# Altium PCB nizn.PcbDoc
Units mil, origin at the board's own origin, x right, y up, seen from the top; angles counter-clockwise.
Board outline 5100 x 2650 mil, 2 copper layers (Top Layer, Bottom Layer); 71 components, 46 nets, 177 pads, 0 vias.
Unrouted connection lines stored in the file: 122.
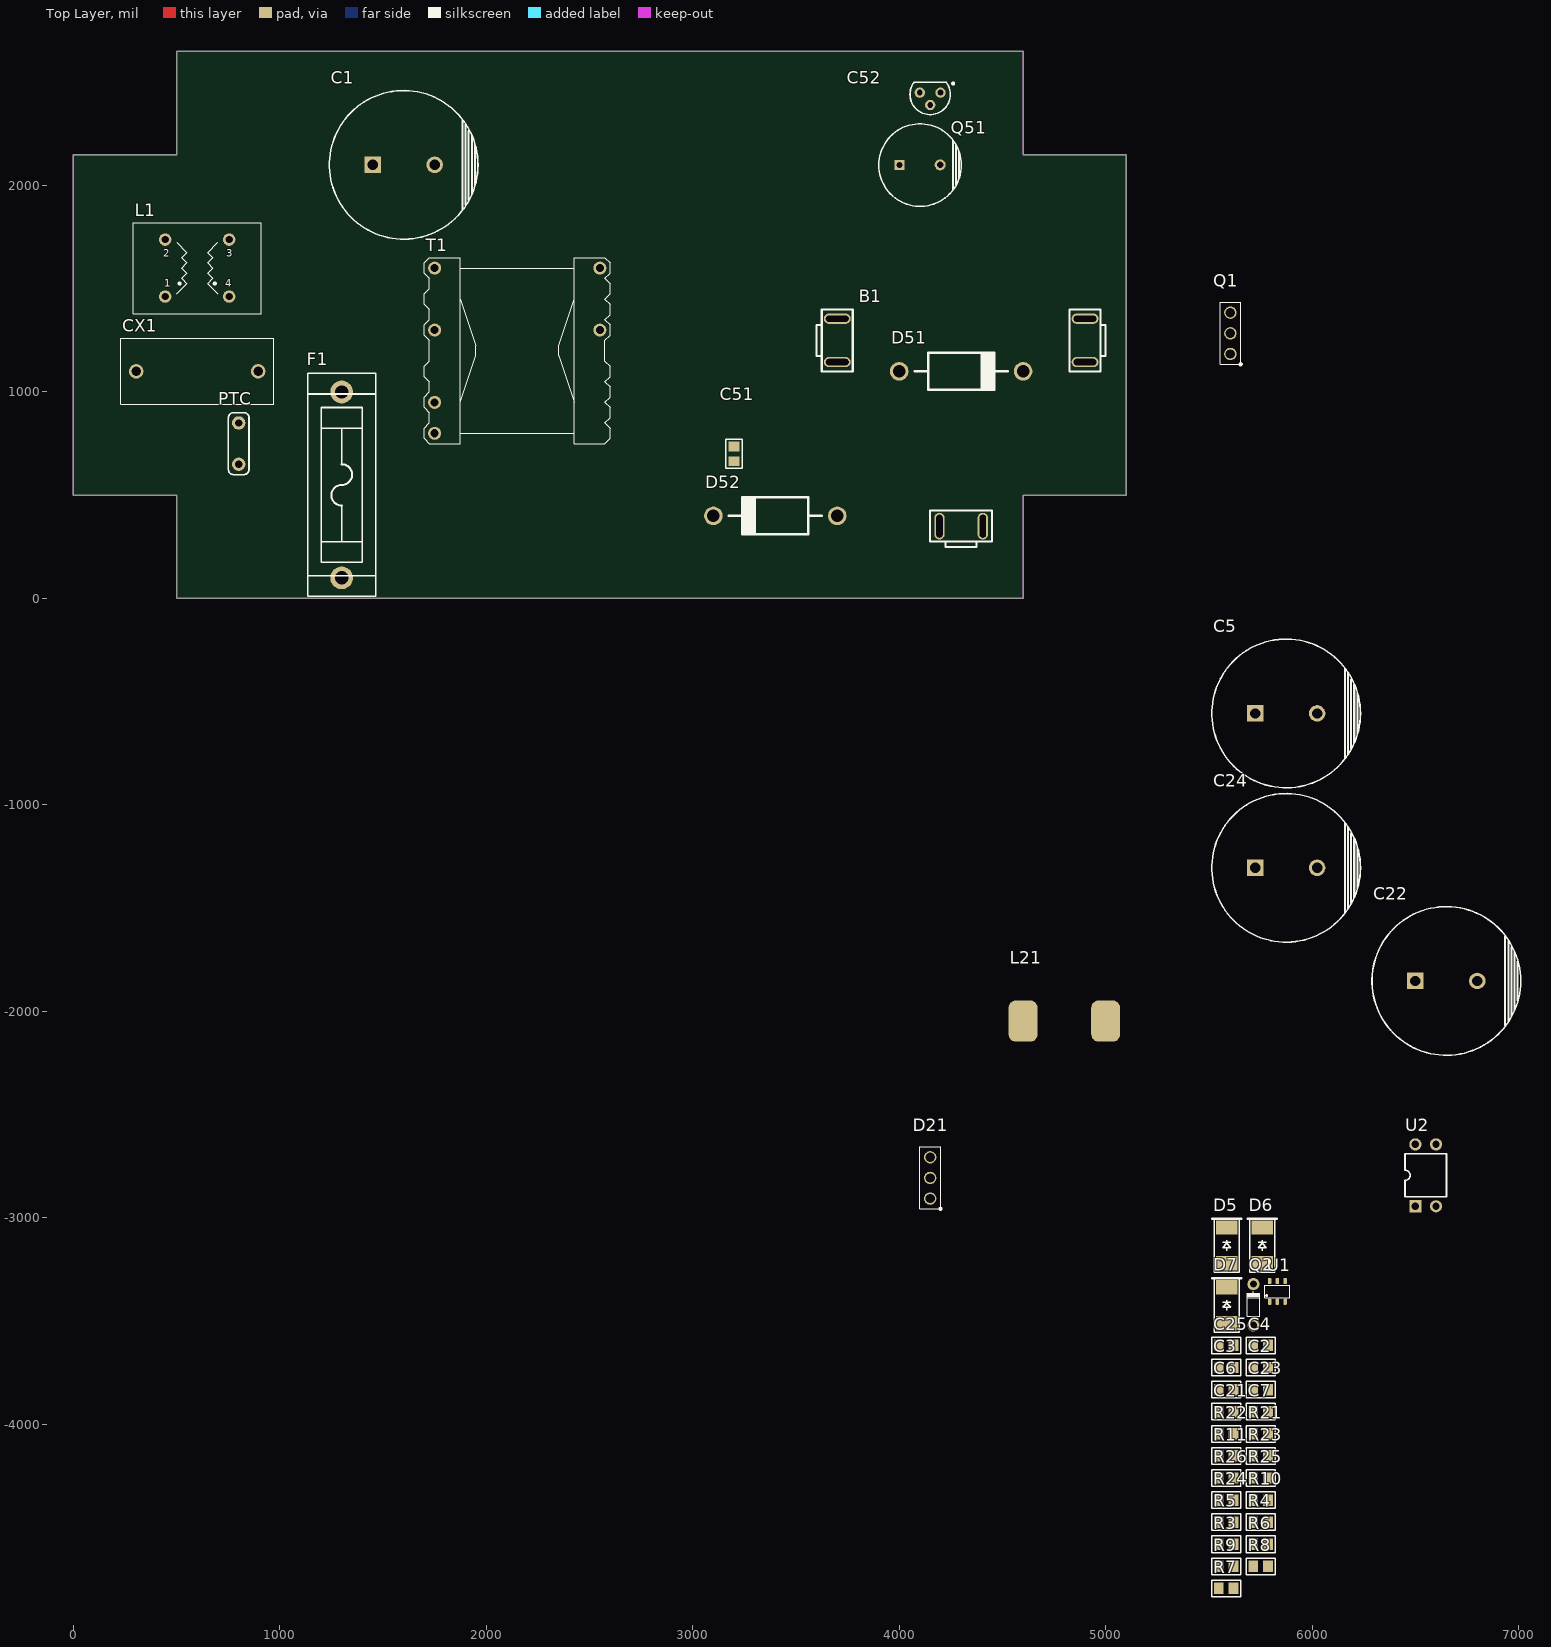
[diagram p0: Top Layer view]
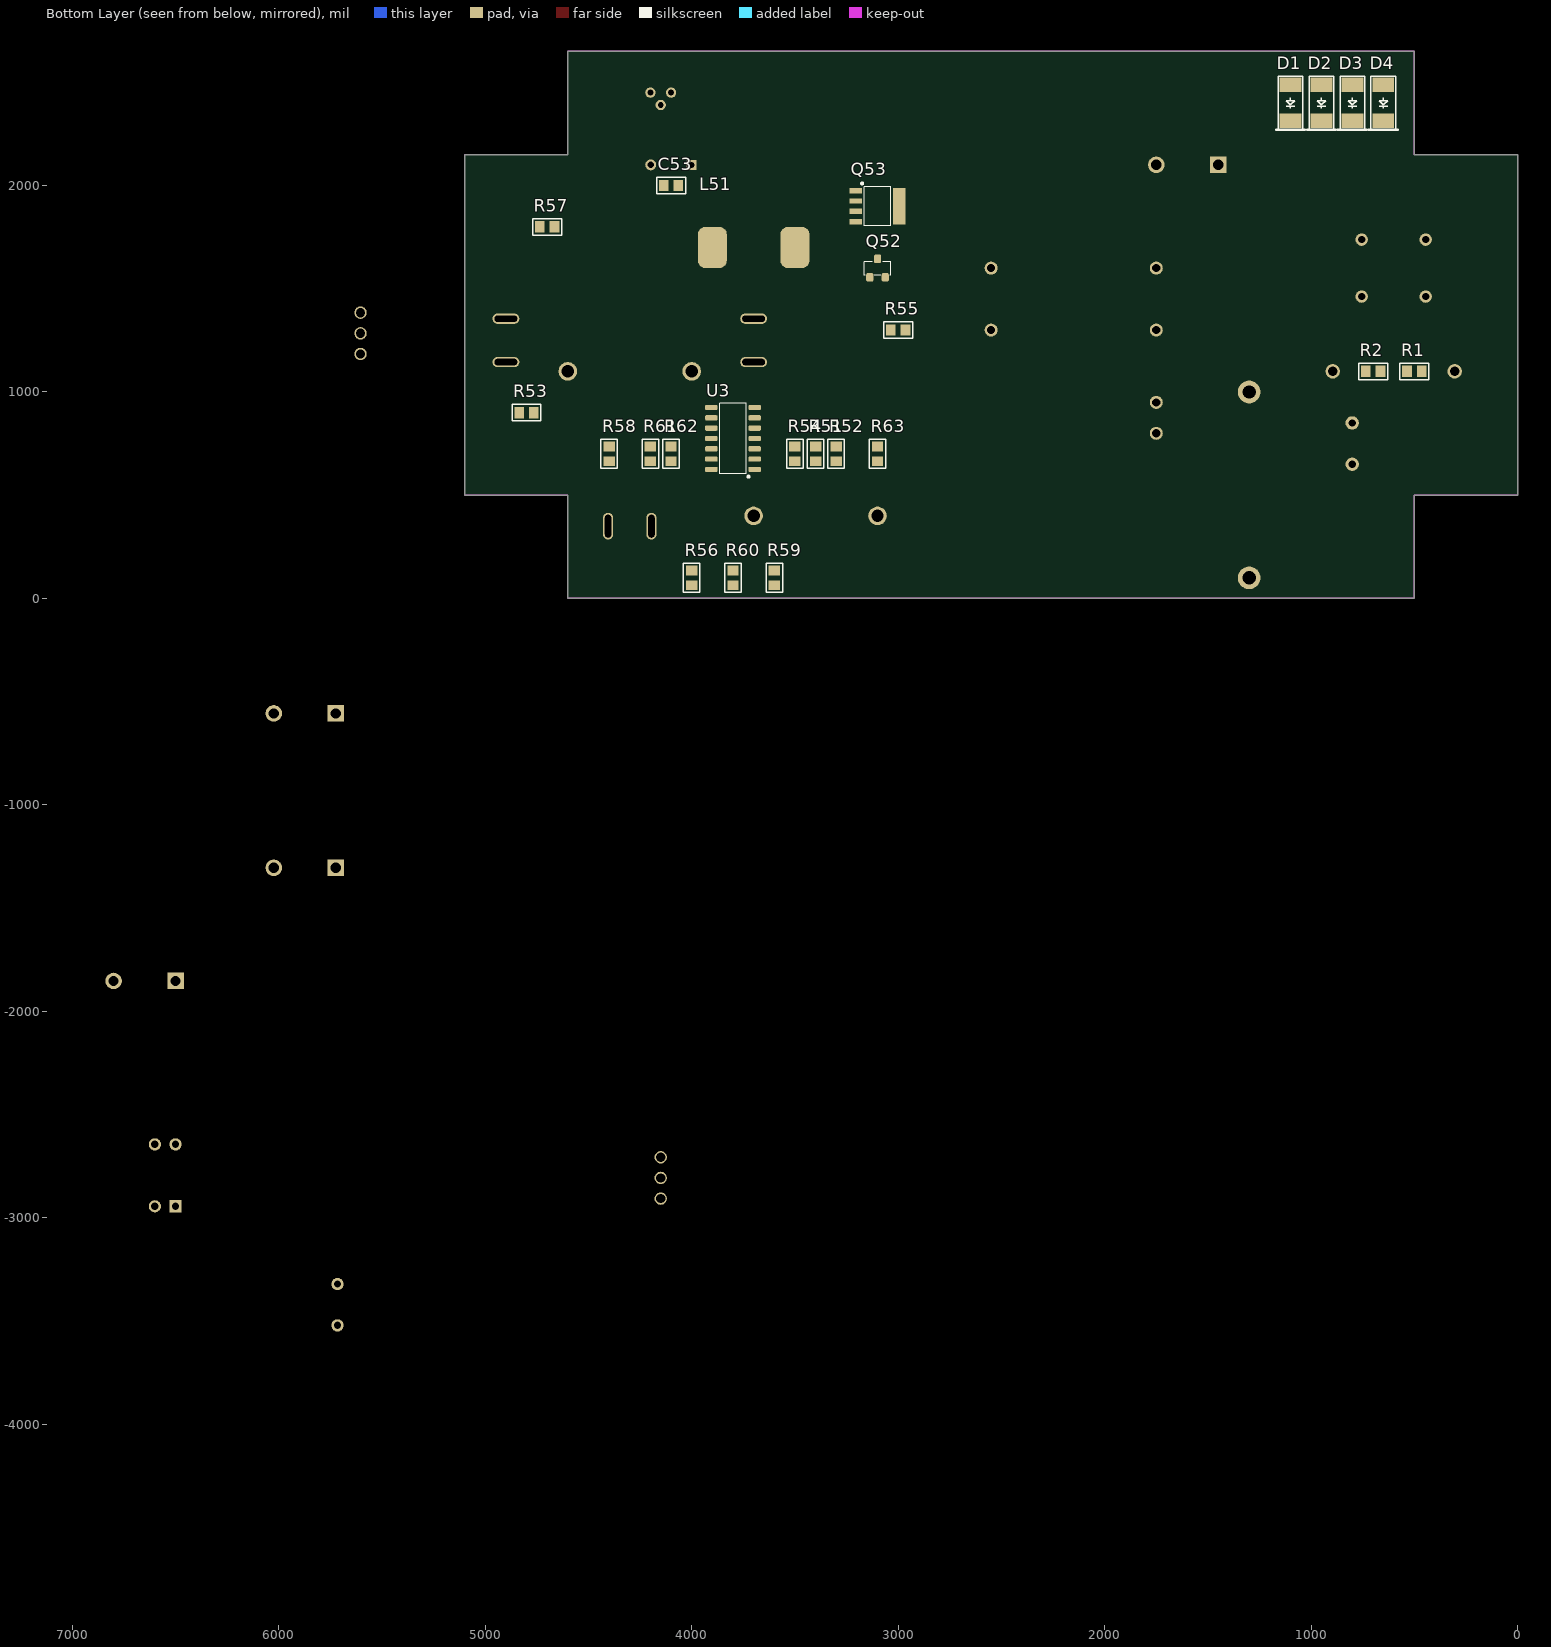
[diagram p1: Bottom Layer view, seen from below]

## Layer stack, top to bottom
Top Layer: signal copper 1.4
Dielectric: dielectric 12.6, FR-4, Dk 4.8
Bottom Layer: signal copper 1.4

## Board outline
0,500 0,2150 500,2150 500,2650 4600,2650 4600,2150 5100,2150 5100,500 4600,500 4600,0 500,0 500,500

## Design rules (kind name [scope] priority, off if disabled: settings)
Clearance [All] p1: gap=10
Height [All] p1: minheight=0 maxheight=2000 prefheight=500
PolygonConnect [All] p1: connectstyle=Relief reliefconductorwidth=10 reliefentries=4 polygonreliefangle="90 Angle" airgapwidth=10
RoomDefinition power [InComponentClass('power')] p1: confinementstyle=ConfineOut formatcopy=TRUE lockcomponents=FALSE outline 5500,1000 6000,1000 6000,1500 5500,1500
RoomDefinition charger [InComponentClass('charger')] p2: confinementstyle=ConfineOut formatcopy=TRUE lockcomponents=FALSE outline 5500,0 6000,0 6000,500 5500,500
RoutingVias [All] p1: holewidth=28 width=50 viastyle="Through Hole" minholewidth=28 minwidth=50 maxholewidth=28 maxwidth=50
SolderMaskExpansion [All] p1: expansion=4
Width [All] p1: maxlimit=10 minlimit=10 preferedwidth=10
27 further rules are at their usual default settings.

## Classes and differential pairs
component class charger: B1 C51 C52 C53 D51 D52 L51 Q51 Q52 Q53 R51 R52 R53 R54 R55 R56 R57 R58 R59 R60 R61 R62 R63 U3
component class power: C1 C2 C3 C4 C5 C6 C7 C21 C22 C23 C24 C25 CX1 D1 D2 D3 D4 D5 D6 D7 D21 F1 L1 L21 PTC Q1 Q2 R1 R2 R3 R4 R5 R6 R7 R8 R9 R10 R11 R21 R22 R23 R24 R25 R26 T1 U1 U2

## Components (designator, comment, footprint, x,y, rotation, side; value= is the part's Value field where it differs from the comment)
B1 "BATT" BATT 4300,1250 r0 top
C1 "68uF400V" CAP1 1600,2100 r0 top
C2 "Cap" CAP0805 5750.5,-3724.63 r0 top
C3 "Cap" CAP0805 5583.5,-3724.63 r0 top
C4 "Cap" CAP0805 5750.5,-3617.63 r0 top
C5 "10uF" CAP1 5873.94,-556.81 r0 top
C6 "Cap" CAP0805 5583.5,-3831.63 r0 top
C7 "Cap" CAP0805 5750.5,-3938.63 r0 top
C21 "Cap" CAP0805 5583.5,-3938.63 r0 top
C22 "330uF" CAP1 6650,-1852.56 r0 top
C23 "Cap" CAP0805 5750.5,-3831.63 r0 top
C24 "68uF400V" CAP1 5873.94,-1304.68 r0 top
C25 "Cap" CAP0805 5583.5,-3617.63 r0 top
C51 "Cap" CAP0805 3200,700 r90 top
C52 "330uF25V" CAP2 4100,2100 r0 top
C53 "Cap" CAP0805 4100,2000 r180 bottom
CX1 "Cap" CAPX2 600,1100 r180 top
D1 "M7" DO214AC 1100,2400 r270 bottom
D2 "M7" DO214AC 950,2400 r270 bottom
D3 "M7" DO214AC 800,2400 r270 bottom
D4 "M7" DO214AC 650,2400 r270 bottom
D5 "ES1J" DO214AC 5586,-3133.57 r90 top
D6 "1N4148" DO214AC 5758,-3133.57 r90 top
D7 "ES1J" DO214AC 5586,-3423.07 r90 top
D21 "MBR2080CT" TO220 4150,-2806.4 r90 top
D51 "1N5822" DIO4 4300,1100 r0 top
D52 "1N5822" DIO4 3400,400 r180 top
F1 "2A250V" FUSE 1300,1000 r270 top
L1 "1mH" BU9 600,1600 r0 top
L21 "33uH" CD127 4800,-2046.82 r0 top
L51 "33uH" CD127 3700,1700 r180 bottom
PTC "5D-9" PTC 801,750 r90 top
Q1 "HX840" TO220 5604,1284.12 r90 top
Q2 "TL431" DIO2 5715.53,-3420.6 r90 top
Q51 "TL431" TO-92D 4150,2450 r90 top
Q52 "BC847C" SOT23_CBE 3100,1600 r180 bottom
Q53 "SI4425" SO8-MOS 3100,1900 r270 bottom
R1 "Res1" RES0805 500,1100 r180 bottom
R2 "Res1" RES0805 700,1100 r180 bottom
R3 "Res1" RES0805 5583.5,-4580.63 r0 top
R4 "Res1" RES0805 5750.5,-4473.63 r0 top
R5 "Res1" RES0805 5583.5,-4473.63 r0 top
R6 "Res1" RES0805 5750.5,-4580.63 r0 top
R7 "Res1" RES0805 5583.5,-4794.63 r0 top
R8 "Res1" RES0805 5750.5,-4687.63 r0 top
R9 "Res1" RES0805 5583.5,-4687.63 r0 top
R10 "Res1" RES0805 5750.5,-4366.63 r0 top
R11 "Res1" RES0805 5583.5,-4152.63 r0 top
R21 "Res1" RES0805 5750.5,-4045.63 r0 top
R22 "Res1" RES0805 5583.5,-4045.63 r0 top
R23 "Res1" RES0805 5750.5,-4152.63 r0 top
R24 "Res1" RES0805 5583.5,-4366.63 r0 top
R25 "Res1" RES0805 5750.5,-4259.63 r0 top
R26 "Res1" RES0805 5583.5,-4259.63 r0 top
R51 "Res1" RES0805 3400,700 r270 bottom
R52 "Res1" RES0805 3300,700 r90 bottom
R53 "Res1" RES0805 4800,900 r180 bottom
R54 "Res1" RES0805 3500,700 r270 bottom
R55 "Res1" RES0805 3000,1300 r180 bottom
R56 "Res1" RES0805 4000,100 r270 bottom
R57 "Res1" RES0805 4700,1800 r180 bottom
R58 "Res1" RES0805 4400,700 r90 bottom
R59 "Res1" RES0805 3600,100 r270 bottom
R60 "Res1" RES0805 3800,100 r90 bottom
R61 "Res1" RES0805 4200,700 r90 bottom
R62 "Res1" RES0805 4100,700 r270 bottom
R63 "Res1" RES0805 3100,700 r90 bottom
T1 "Transformer" PQ20C1 2150,1200 r0 top
U1 "OB2263" SOT23-6 5831.56,-3356.07 r0 top
U2 "PC817C" DIP-4 6550,-2794.04 r0 top
U3 "TINY24A" SO14 3800,700 r90 bottom

## Footprints (in the part's own frame and the unit in brackets; to place one, negate y for a bottom-side part, rotate by r counter-clockwise, add the part's x,y. Pads: shape width x height; smd on the part's side, far side on the other; paste and mask are expansions set on the pad)
BATT [mil]
  oval 130x50 hole 30 slot 110 at 0 deg: 1(600,-105) 1(600,105) 2(-600,-105) 2(-600,105)
  oval 50x130 hole 30 slot 110 at 90 deg: 3(-105,-900) 3(105,-900)
  silkscreen extent -700,-1000 700,150, body extent -700,-1000 700,105, height 800
BU9 [mil]
  round 60 hole 35: 1(-155,-138) 2(-155,138) 3(155,138) 4(155,-138)
  silkscreen extent -310,-220 310,220, body extent -311,-217 311,217, height 625
CAP1 [mil]
  rect 80x80 hole 50: 1(-150,0)
  round 80 hole 50: 2(150,0)
  silkscreen extent -360,-360 360,360, body extent -354,-354 355,354, height 1304
CAP2 [mm]
  rect 1.25x1.25 hole 0.75: 1(-2.5,0)
  round 1.35 hole 0.8: 2(2.5,0)
  silkscreen extent -5.05,-5.11 5.11,5.05, body extent -4.97,-5.01 5.03,4.98, height 14.1
CAP0805 [mm]
  rect 1.2x1.4 smd: 1(-0.9,0) 2(0.9,0)
  silkscreen extent -1.78,-1.02 1.78,1.02, body extent -1,-0.62 1,0.63, height 0.78
CAPX2 [mil]
  round 70 hole 45: 1(-295.28,0) 2(295.28,0)
  silkscreen extent -370,-160 370,160, body extent -374,-157 374,157, height 636
CD127 [mil]
  rrect50% 140x200 smd: 1(200,0) 2(-200,0)
  body extent -246,-246 246,246, height 315
DIO2 [mm]
  round 1.5 hole 0.9: 1(-2.54,0) 2(2.54,0)
  silkscreen extent -1.65,-0.76 1.65,0.76, body extent -2.74,-0.84 2.77,0.81, height 1.81
DIO4 [mil]
  round 90 hole 60: 1(-300,0) 2(300,0)
  silkscreen extent -225,-90 225,90, body extent -321,-104 321,104, height 254
DIP-4 [mm] "DIP; 4 Leads; Row Spacing 7.62 mm; Pitch 2.54 mm"
  rect 1.5x1.5 hole 0.9: 1(-1.27,-3.81)
  round 1.5 hole 0.9: 2(1.27,-3.81) 3(1.27,3.81) 4(-1.27,3.81)
  silkscreen extent -2.55,-2.65 2.55,2.65, body extent -2.75,-3.94 2.79,4.06, height 5.58
DO214AC [mil]
  rect 70x105 smd: 1(-87,0) 2(87,0)
  silkscreen extent -130,-70 130,70, body extent -108,-55 108,55, height 90
FUSE [mil]
  round 110 hole 65: 1(0,0) 2(900,0)
  silkscreen extent -90,-165 990,165, body extent -100,-180 1000,175, height 575
PQ20C1 [mm]
  round 1.6 hole 1: 1(-10.16,10.16) 2(-10.16,2.54) 3(-10.16,-6.35) 4(-10.16,-10.16) 5(10.16,2.54) 6(10.16,10.16)
  silkscreen extent -11.43,-11.43 11.43,11.43, body extent -11.43,-11.43 11.43,11.43, height 25.45
PTC [mm]
  round 1.65 hole 0.889: 1(-2.54,0) 2(2.54,0)
  silkscreen extent -3.81,-1.27 3.81,1.27, body extent -3.96,-2.81 4.03,2.79, height 11.97
RES0805 [mm]
  rect 1.2x1.4 smd: 1(-0.9,0) 2(0.9,0)
  silkscreen extent -1.78,-1.02 1.78,1.02, body extent -1.12,-0.69 1.18,0.66, height 0.76
SO8-MOS [mil]
  rect 177.17x60 smd: D(0,105)
  rect 25.59x60 smd: G(75,-105) S(-75,-105) S(-25,-105) S(25,-105)
  silkscreen extent -115,-80 95,65, body extent -96,-118 96,118, height 67
SO14 [mil]
  rrect50% 25.59x60 smd: 1(-75,-105) 2(-25,-105) 3(25,-105) 4(75,-105) 6(175,-105) 7(225,-105) 8(225,105) 9(175,105) 10(125,105) 11(75,105) 12(25,105) 13(-25,105) 14(-75,105)
  rrect50% 25.59x60 smd mask+4: 5(125,-105)
  silkscreen extent -115,-80 245,65, body extent -93,-114 243,114, height 69
SOT23-6 [mil]
  rrect50% 16x30 smd: 1(-37.5,-50) 2(0,-50) 3(37.5,-50) 4(37.5,50) 5(0,50) 6(-37.5,50)
  silkscreen extent -60,-30 60,30, body extent -59,-55 59,55, height 34
SOT23_CBE [mil]
  rrect50% 35x42 smd: B(-37.4,-45) C(0,45) E(37.4,-45)
  silkscreen extent -65,-35 65,30, body extent -59,-52 59,52, height 43
TO220 [mil]
  round 60 hole 45: 1(-100,0) 2(0,0) 3(100,0)
  silkscreen extent -155,-55 150,50, body extent -194,-83 196,94, height 860
TO-92D [mil]
  round 50 hole 28: 1(0,-50) 2(-60,0) 3(0,50)
  silkscreen extent -107,-116 50,98, body extent -94,-94 60,94, height 315

## Part data
B1: "NiZn Battery"
C1 C5 C22 C24 C52: library part "Cap Pol2", "Polarized Capacitor (Axial)"
C2 C3 C4 C6 C7 C21 C23 C25 C51 C53 CX1: "Capacitor"
D1 D2 D3 D4 D5 D6 D7 D51 D52: library part Diode, "1 Amp Fast Recovery Rectifier"
D21: library part Diode2, "Dual Diode TO-220"
F1: library part "Fuse 2", "Fuse"
L1: library part TRANS3
L21 L51: library part Inductor, "Inductor"
PTC: library part Res1, "Resistor"
Q1: library part NMOS, "MOSFET N"
Q2 Q51: "Reference"
Q52: library part NPN, "NPN Bipolar Transistor"
Q53: library part PMOS, "MOSFET P"
R1 R2 R3 R4 R5 R6 R7 R8 R9 R10 R11 R21 R22 R23 R24 R25 R26 R51 R52 R53 R54 R55 R56 R57 R58 R59 R60 R61 R62 R63: "Resistor"
T1: library part PQ20C1
U1: "OB2263 PWM Controller"
U2: library part Optoisolator1, "4-Pin Phototransistor Optocoupler"
U3: library part TINY13A, "PI TinySwitch II"

## Nets (pads, with @x,y where several pads share a name; then routed paths per layer and width w, separated by ;. In a path a pad name is that pad's centre, name@x,y a point inside that pad or via, vN(x,y) a via of type N, cw(c..) or ccw(c..) an arc to the next point about the centre after c; other vN are vias at no path point)
5V: R51.2 R54.2 U3.1
15V: C24.1 L21.2 Q53.S R57.2
AREF: C51.2 Q51.3 R51.1 R52.2 R63.2 U3.13
GND: B1.2 C22.2 C23.1 C24.2 C51.1 C52.2 C53.1 D51.2 Q2.2 Q51.2 Q52.E R26.1 R53.1 R56.1 R60.2 R62.2 T1.5 U3.14
IBAT: R59.2 R60.1 U3.12
L: F1.1
N: CX1.1 L1.4 R2.1
NetB1_1: B1.1 R58.1 R61.1
NetC1_1: C1.1 C2.2 D1.2 D2.2 R3.2 R5.2 T1.2
NetC2_1: C2.1 D5.2 R5.1
NetC3_1: C3.1 R8.2 R9.1
NetC3_2: C3.2 D5.1 T1.1
NetC4_2: C4.2 R9.2 U1.4
NetC5_1: C5.1 C6.2 D7.2 R4.1 U1.5
NetC7_2: C7.2 U1.2 U2.4
NetC21_1: C21.1 C22.1 C23.2 D21.2 L21.1 R22.1
NetC21_2: C21.2 R21.1
NetC25_1: C25.1 R25.2
NetC25_2: C25.2 U2.2
NetC52_1: C52.1 C53.2 D52.1 L51.2
NetCX1_2: CX1.2 L1.1 PTC.2 R1.2
NetD1_1: D1.1 D3.2 L1.2
NetD2_1: D2.1 D4.2 L1.3
NetD6_1: D6.1 R6.2
NetD6_2: D6.2 R6.1 R7.1
NetD7_1: D7.1 R10.1
NetD21_1: D21.1 D21.3 R21.2 T1.6
NetD51_1: D51.1 L51.1 Q53.D
NetD52_2: D52.2 R58.2 R59.1
NetF1_2: F1.2 PTC.1
NetQ2_1: Q2.1 R24.1 R25.1 R26.2
NetQ51_1: Q51.1 R52.1 R53.2
NetQ52_B: Q52.B R55.1 R56.2
NetQ52_C: Q52.C Q53.G R57.1
NetR1_1: R1.1 R2.2
NetR3_1: R3.1 R4.2
NetR7_2: R7.2 U1.6
NetR10_2: R10.2 T1.3
NetR11_2: R11.2 U1.3
NetR22_2: R22.2 R23.2 R24.2
NetR23_1: R23.1 U2.1
NetR54_1: R54.1 U3.4
PGND: C1.2 C4.1 C5.2 C6.1 C7.1 D3.1 D4.1 R8.1 R11.1 T1.4 U1.1 U2.3
PWM: R55.2 U3.5
TBAT: B1.3 R63.1 U3.10
VBAT: R61.2 R62.1 U3.11
pads on no net: Q1.1 Q1.2 Q1.3 U3.2 U3.3 U3.6 U3.7 U3.8 U3.9

## Keep-outs
Keep-Out Layer:
  the board outline again, w3

## Dimensions
0,2150 to 5100,2150 on Keep-Out Layer
500,0 to 500,2650 on Keep-Out Layer

## Text inside footprints (layer, text, board x,y; h text height)
L1: Top Overlay "3" at 740,1655 h36; Top Overlay "2" at 435,1655 h36; Top Overlay "4" at 735,1510 h36; Top Overlay "1" at 440,1510 h36